# Altium PCB Mixed Signal Board Project.PcbDoc
Units mm, origin at the board's own origin, x right, y up, seen from the top; angles counter-clockwise.
Board outline 70.1 x 70.99 mm, 2 copper layers (Top Layer, Bottom Layer); 188 components, 145 nets, 738 pads, 10 vias.
Unrouted connection lines stored in the file: 494.
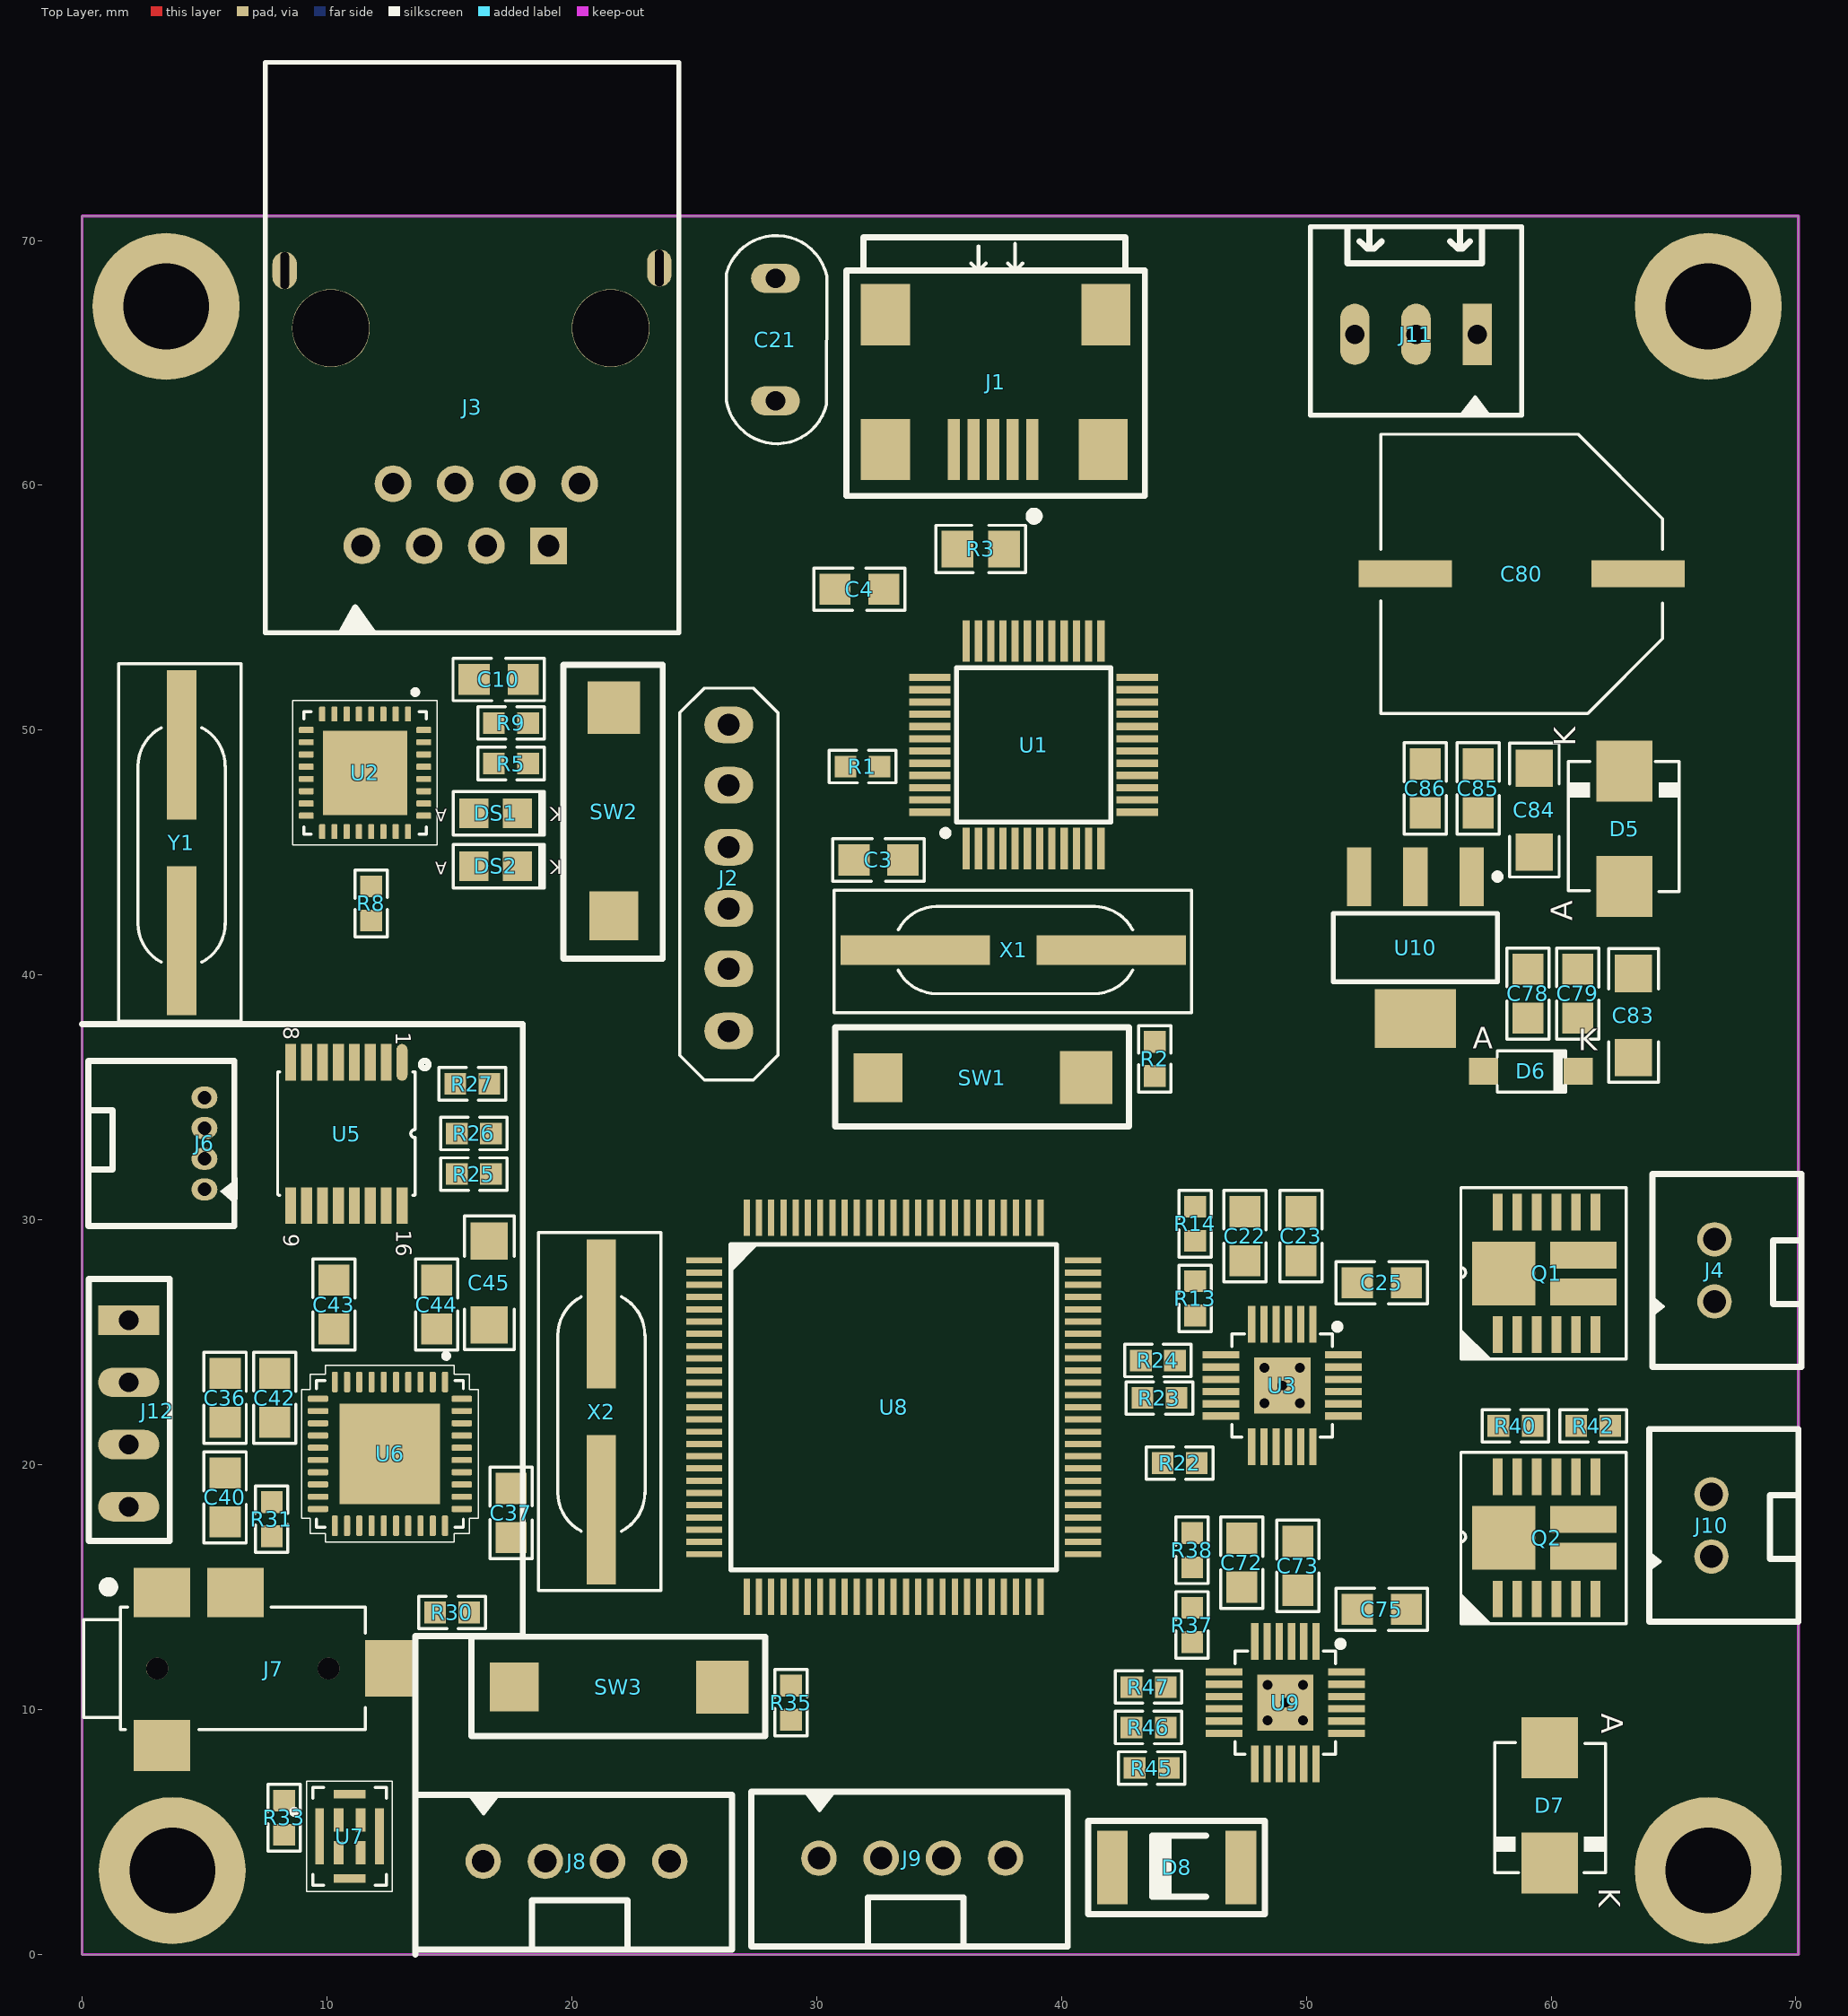
[diagram p0: Top Layer view]
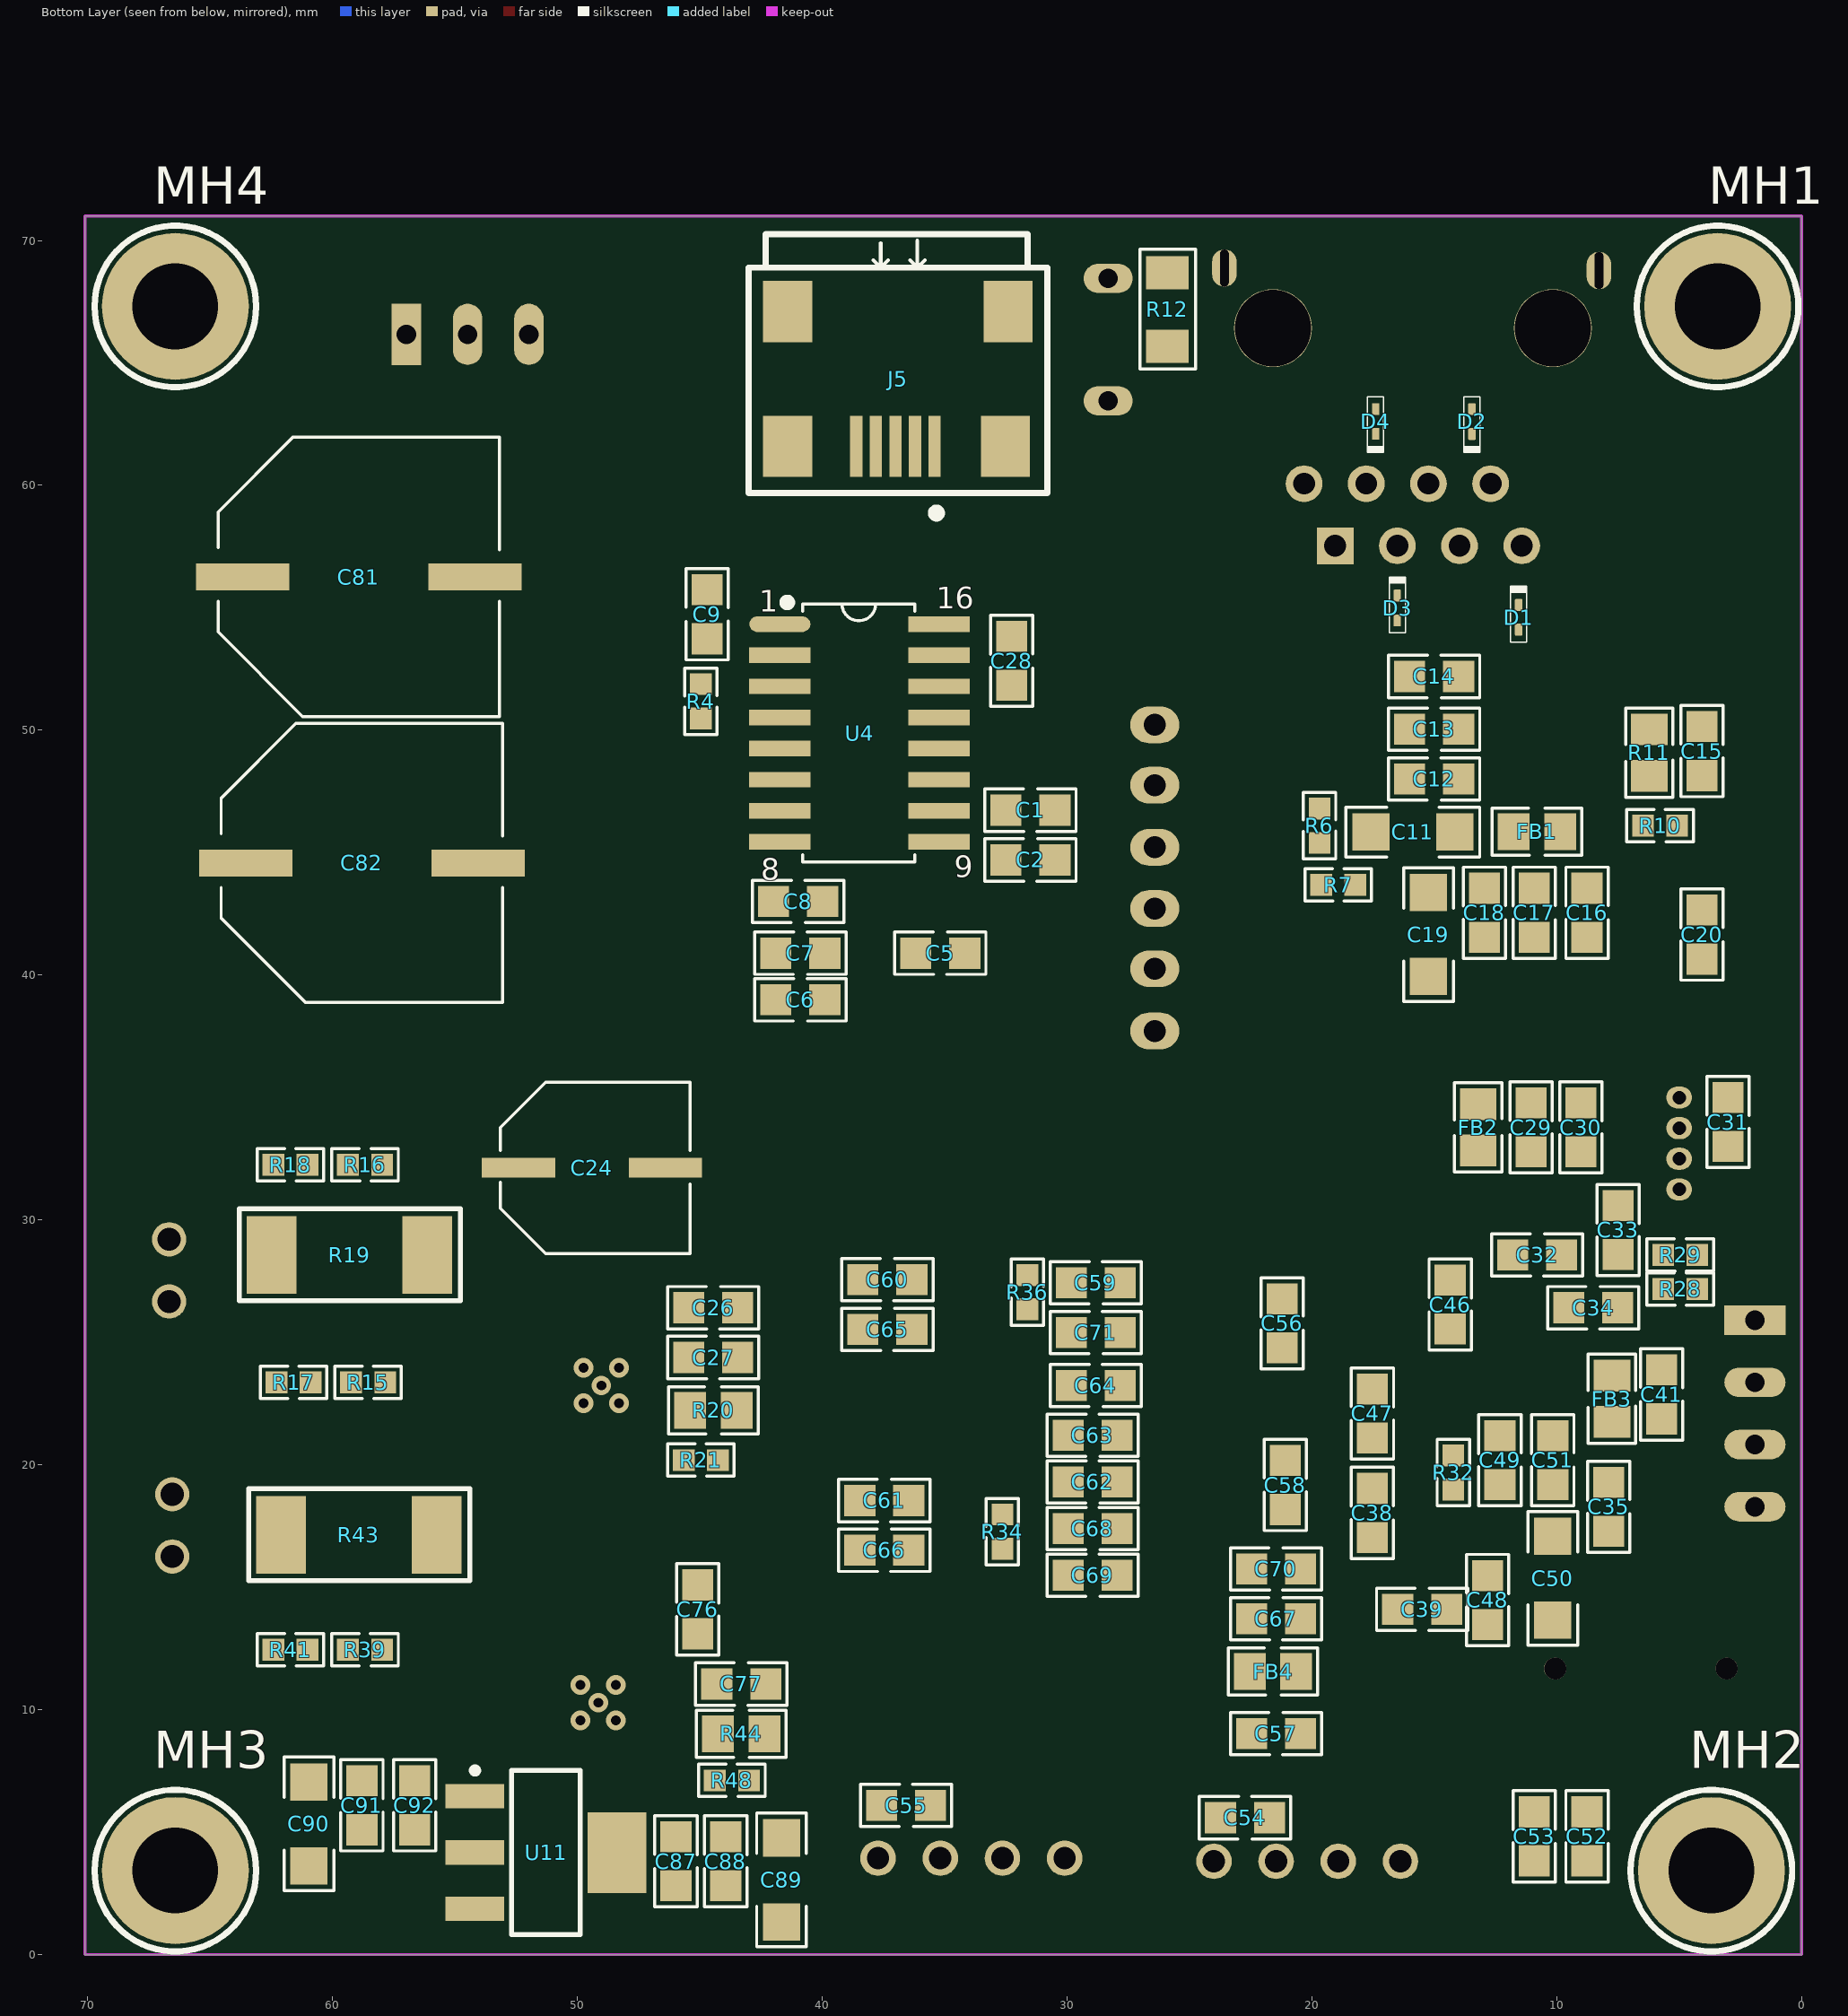
[diagram p1: Bottom Layer view, seen from below]

## Layer stack, top to bottom
Top Solder: solder mask 0.0102, Solder Resist, Dk 3.5
Top Layer: signal copper 0.0356
Dielectric 1: dielectric 0.32, FR-4, Dk 4.8
Bottom Layer: signal copper 0.0356
Bottom Solder: solder mask 0.0102, Solder Resist, Dk 3.5

## Board outline
0,0 0,70.993 70.104,70.993 70.104,0

## Design rules (kind name [scope] priority, off if disabled: settings)
Clearance [All] p1: gap=0.254 ignorepadtopadclearanceinfootprint=TRUE except(0: Arc-Hole Track-Hole SMDPad-Hole THPad-Hole Via-Hole Fill-Hole Poly-Hole Region-Hole Text-Hole)
DiffPairsRouting [All] p1: maxlimit=0.254 minlimit=0.254 mostfreqgap=0.254 toplayer_minwidth=0.381 toplayer_maxwidth=0.381 toplayer_prefwidth=0.381 bottomlayer_minwidth=0.381 bottomlayer_maxwidth=0.381 bottomlayer_prefwidth=0.381 substack1={4C87D943-4441-4401-8E35-BCE7F7EB81D5} toplayer_{4c87d943-4441-4401-8e35-bce7f7eb81d5}_minwidth=0.381 toplayer_{4c87d943-4441-4401-8e35-bce7f7eb81d5}_maxwidth=0.381 toplayer_{4c87d943-4441-4401-8e35-bce7f7eb81d5}_prefwidth=0.381 bottomlayer_{4c87d943-4441-4401-8e35-bce7f7eb81d5}_minwidth=0.381 bottomlayer_{4c87d943-4441-4401-8e35-bce7f7eb81d5}_maxwidth=0.381 bottomlayer_{4c87d943-4441-4401-8e35-bce7f7eb81d5}_prefwidth=0.381 maxuncoupledlength=12.7
PolygonConnect [All] p1: connectstyle=Relief reliefconductorwidth=0.254 reliefentries=4 polygonreliefangle="90 Angle" airgapwidth=0.254
RoutingVias [All] p1: holewidth=0.711 width=1.27 viastyle="Through Hole" minholewidth=0.711 minwidth=1.27 maxholewidth=0.711 maxwidth=1.27
SolderMaskExpansion [All] p1: expansion=0.102 istentingtop=FALSE
Width [All] p1: maxlimit=0.254 minlimit=0.254 preferedwidth=0.254 substack1={4C87D943-4441-4401-8E35-BCE7F7EB81D5}
29 further rules are at their usual default settings.

## Classes and differential pairs
differential pair class DIFF100: RD TD
differential pair class DIFF90: CH340USB_D USBD
net class 50OHM: COL CRS INT MDC MDIO RX_CLK RX_D0 RX_D1 RX_D2 RX_D3 RX_DV RX_ER TX_CLK TX_D0 TX_D1 TX_D2 TX_D3 TX_EN
component class "[11]- Power Input and Regulators": C78 C79 C80 C81 C82 C83 C84 C85 C86 C87 C88 C89 C90 C91 C92 D5 D6 D7 D8 J11 MH1 MH2 MH3 MH4 U10 U11
component class "[10]-Motor Driver-2": C72 C73 C75 C76 C77 J10 Q2 R37 R38 R39 R40 R41 R42 R43 R44 R45 R46 R47 R48 U9
component class "[9]-STM32F407 Controller": C54 C55 C56 C57 C58 C59 C60 C61 C62 C63 C64 C65 C66 C67 C68 C69 C70 C71 FB4 J8 J9 R34 R35 R36 SW3 U8 X2
component class "[8]-DAC and MIC": C35 C36 C37 C38 C39 C40 C41 C42 C43 C44 C45 C46 C47 C48 C49 C50 C51 C52 C53 FB3 J7 J12 R30 R31 R32 R33 U6 U7
component class "[7]- ADC Chip": C29 C30 C31 C32 C33 C34 FB2 J6 R25 R26 R27 R28 R29 U5
component class [6]-CH340C: C28 J5 U4
component class "[5]-Motor Driver Schematic": C22 C23 C24 C25 C26 C27 J4 Q1 R13 R14 R15 R16 R17 R18 R19 R20 R21 R22 R23 R24 U3
component class "[4]- Ethernet PHY": C10 C11 C12 C13 C14 C15 C16 C17 C18 C19 C20 C21 D1 D2 D3 D4 DS1 DS2 FB1 J3 R5 R6 R7 R8 R9 R10 R11 R12 SW2 U2 Y1
component class "[3]-STM32F103 Debugger": C1 C2 C3 C4 C5 C6 C7 C8 C9 J1 J2 R1 R2 R3 R4 SW1 U1 X1
differential pair USBD: +USBD_P -USBD_N
differential pair TD: +TD_P -TD_N
differential pair RD: +RD_P -RD_N
differential pair CH340USB_D: +CH340USB_D_P -CH340USB_D_N

## Components (designator, comment, footprint, x,y, rotation, side; value= is the part's Value field where it differs from the comment)
C1 "4.7uF" CAP_0805 31.496,46.736 r0 bottom
C2 "0.1uF" CAP_0805 31.496,44.704 r0 bottom
C3 "0.1uF" CAP_0805 32.528,44.704 r0 top
C4 "0.1uF" CAP_0805 31.75,55.753 r0 top
C5 "30pF" CAP_0805 35.179,40.894 r0 bottom
C6 "30pF" CAP_0805 40.894,38.989 r180 bottom
C7 "1uF" CAP_0805 40.894,40.894 r180 bottom
C8 "10nF" CAP_0805 40.985,43.006 r180 bottom
C9 "0.1uF" CAP_0805 44.704,54.737 r270 bottom
C10 "2nF" CAP_0805 17.015,52.07 r180 top
C11 "10uF" CAP_1206 15.875,45.847 r180 bottom
C12 "1uF" CAP_0805 15.008,48.006 r180 bottom
C13 "0.1uF" CAP_0805 15.008,50.038 r180 bottom
C14 "10nF" CAP_0805 15.008,52.197 r180 bottom
C15 "20pF" CAP_0805 4.064,49.149 r270 bottom
C16 "10nF" CAP_0805 8.763,42.545 r90 bottom
C17 "0.1uF" CAP_0805 10.922,42.545 r90 bottom
C18 "1uF" CAP_0805 12.954,42.545 r90 bottom
C19 "10uF" CAP_1206 15.24,41.656 r90 bottom
C20 "20pF" CAP_0805 4.064,41.656 r90 bottom
C21 "10nF" CAP_P196_102X287_H332_RAD_TH 28.321,68.453 r270 top
C22 "0.1uF" CAP_0805 47.498,29.337 r270 top
C23 "1uF" CAP_0805 49.784,29.337 r90 top
C24 "100uF" ACAP_P236_D305_H303_RAD 49.403,32.131 r180 bottom
C25 "0.1uF" CAP_0805 53.086,27.432 r180 top
C26 "1uF" CAP_0805 44.45,26.416 r0 bottom
C27 "1uF" CAP_0805 44.45,24.384 r0 bottom
C28 "0.1uF" CAP_0805 32.258,52.832 r90 bottom
C29 "0.1uF" CAP_0805 11.049,33.782 r270 bottom
C30 "0.1uF" CAP_0805 9.017,33.782 r270 bottom
C31 "0.1uF" CAP_0805 3,34 r270 bottom
C32 "0.1uF" CAP_0805 10.795,28.575 r0 bottom
C33 "10nF" CAP_0805 7.493,29.591 r270 bottom
C34 "10nF" CAP_0805 8.509,26.416 r0 bottom
C35 "22nF" CAP_0805 7.874,18.288 r90 bottom
C36 "0.1uF" CAP_0805 5.842,22.733 r270 top
C37 "1uF" CAP_0805 17.526,18.034 r90 top
C38 "0.1uF" CAP_0805 17.526,18.034 r90 bottom
C39 "22nF" CAP_0805 15.494,14.097 r0 bottom
C40 "0.1uF" CAP_0805 5.842,18.669 r90 top
C41 "1uF" CAP_0805 5.715,22.876 r270 bottom
C42 "1uF" CAP_0805 7.874,22.733 r270 top
C43 "1uF" CAP_0805 10.287,26.543 r270 top
C44 "0.1uF" CAP_0805 14.478,26.543 r270 top
C45 "10uF" CAP_1206 16.637,27.432 r270 top
C46 "0.1uF" CAP_0805 14.351,26.543 r270 bottom
C47 "0.1uF" CAP_0805 17.526,22.098 r270 bottom
C48 "150pF" CAP_0805 12.827,14.478 r270 bottom
C49 "150pF" CAP_0805 12.319,20.193 r90 bottom
C50 "10uF" CAP_1206 10.16,15.367 r270 bottom
C51 "1uF" CAP_0805 10.16,20.193 r90 bottom
C52 "1uF" CAP_0805 8.763,4.826 r90 bottom
C53 "0.1uF" CAP_0805 10.922,4.826 r90 bottom
C54 "0.1uF" CAP_0805 22.733,5.588 r180 bottom
C55 "0.1uF" CAP_0805 36.576,6.096 r180 bottom
C56 "30pF" CAP_0805 21.209,25.781 r90 bottom
C57 "0.1uF" CAP_0805 21.463,9.017 r0 bottom
C58 "30pF" CAP_0805 21.082,19.177 r270 bottom
C59 "4.7uF" CAP_0805 28.829,27.432 r180 bottom
C60 "0.1uF" CAP_0805 37.338,27.559 r0 bottom
C61 "0.1uF" CAP_0805 37.465,18.542 r0 bottom
C62 "0.1uF" CAP_0805 28.956,19.304 r180 bottom
C63 "0.1uF" CAP_0805 28.956,21.209 r180 bottom
C64 "0.1uF" CAP_0805 28.829,23.241 r180 bottom
C65 "2.2uF" CAP_0805 37.338,25.527 r0 bottom
C66 "2.2uF" CAP_0805 37.465,16.51 r0 bottom
C67 "1uF" CAP_0805 21.463,13.716 r0 bottom
C68 "1uF" CAP_0805 28.956,17.399 r180 bottom
C69 "0.1uF" CAP_0805 28.956,15.494 r180 bottom
C70 "0.1uF" CAP_0805 21.463,15.748 r0 bottom
C71 "0.1uF" CAP_0805 28.829,25.4 r180 bottom
C72 "0.1uF" CAP_0805 47.371,16.002 r270 top
C73 "1uF" CAP_0805 49.657,15.875 r90 top
C75 "0.1uF" CAP_0805 53.086,14.097 r180 top
C76 "1uF" CAP_0805 45.085,14.097 r270 bottom
C77 "1uF" CAP_0805 43.307,11.049 r0 bottom
C78 "0.1uF" CAP_0805 59.055,39.243 r270 top
C79 "1uF" CAP_0805 61.087,39.243 r270 top
C80 "100uF" ACAP_P305_D393_H393_RAD 58.801,56.388 r180 top
C81 "100uF" ACAP_P305_D393_H393_RAD 58.928,56.261 r180 bottom
C82 "100uF" ACAP_P305_D393_H393_RAD 58.801,44.577 r180 bottom
C83 "10uF" CAP_1206 63.373,38.354 r270 top
C84 "10uF" CAP_1206 59.309,46.736 r90 top
C85 "1uF" CAP_0805 57.023,47.625 r90 top
C86 "0.1uF" CAP_0805 54.864,47.625 r90 top
C87 "0.1uF" CAP_0805 45.974,3.81 r270 bottom
C88 "1uF" CAP_0805 43.942,3.81 r270 bottom
C89 "10uF" CAP_1206 41.656,3.048 r270 bottom
C90 "10uF" CAP_1206 60.96,5.334 r270 bottom
C91 "1uF" CAP_0805 58.801,6.096 r270 bottom
C92 "0.1uF" CAP_0805 56.642,6.096 r270 bottom
D1 "ESD3V3D9-TP" DIO_SOD-923 11.557,54.61 r270 bottom
D2 "ESD3V3D9-TP" DIO_SOD-923 13.462,62.608 r90 bottom
D3 "ESD3V3D9-TP" DIO_SOD-923 16.51,54.991 r270 bottom
D4 "ESD3V3D9-TP" DIO_SOD-923 17.399,62.611 r90 bottom
D5 "MBRS130LT3G" DIO_SMB_DO-214AA 62.992,45.974 r90 top
D6 "BZT52C3V3-7-F" DIO_SOD-123 59.182,36.068 r0 top
D7 "MBRS130LT3G" DIO_SMB_DO-214AA 59.944,6.096 r270 top
D8 "1.8V Zener" DIO_DO-213AB_SMD 44.704,3.556 r0 top
DS1 "RED LED" LED_0805 16.891,46.609 r180 top
DS2 "RED LED" LED_0805 16.891,44.45 r180 top
FB1 "1K" IND_0805 10.807,45.86 r180 bottom
FB2 "1K" IND_0805 13.208,33.782 r270 bottom
FB3 "1K" IND_0805 7.747,22.698 r90 bottom
FB4 "1K" IND_0805 21.59,11.557 r180 bottom
J1 "USB2.0 MINI B" CON_690-005-299-043 32.811,61.468 r270 top
J2 "Bergstrip 2.54mm" CON6_100_59D78_TH_ST 26.416,37.719 r90 top
J3 "RJ45 LAN" CON10_P106_RJ45_TH_ST 21.575,66.476 r180 top
J4 "B2B-XH-A(LF)(SN)" CON2_100_B2B-XH-A_TH_ST 66.675,26.67 r90 top
J5 "USB2.0 MINI B" CON_690-005-299-043 41.412,61.595 r270 bottom
J6 "1.25MM Spade 4PIN" CON4_50_653004117322_TH_RA 5,35 r90 top
J7 "4X1 STEREO" CON_SJ-2504A-SMT-TR_SMD 6.563,11.684 r0 top
J8 "B4B-XH-A(LF)(SN)" CON4_100_B4B-XH-A_TH_ST 16.383,3.81 r0 top
J9 "B4B-XH-A(LF)(SN)" CON4_100_B4B-XH-A_TH_ST 30.099,3.937 r0 top
J10 "B2B-XH-A(LF)(SN)" CON2_100_B2B-XH-A_TH_ST 66.548,16.256 r90 top
J11 "Terminal Block 2.5mm" CON3_100_TB_TH_ST 54.483,66.167 r270 top
J12 "4X1 BERG STRIP" CON4_100_40D72_TH_ST_MALE 1.905,25.908 r0 top
MH1 "Mounting Hole" MOUNTING 3.429,67.31 r180 bottom
MH2 "Mounting Hole" MOUNTING 3.683,3.429 r180 bottom
MH3 "Mounting Hole" MOUNTING 66.421,3.429 r180 bottom
MH4 "Mounting Hole" MOUNTING 66.421,67.31 r180 bottom
Q1 "DMHT6016LFJ-13" DFN5045-12_33_212_27X15_SMD_1 59.817,27.813 r0 top
Q2 "DMHT6016LFJ-13" DFN5045-12_33_212_27X15_SMD_1 59.817,17.018 r0 top
R1 "100K" RES_0603 31.877,48.514 r0 top
R2 "10K" RES_0603 43.815,36.576 r90 top
R3 "1.5K" RES_0805 36.703,57.404 r0 top
R4 "100K" RES_0603 44.958,51.181 r270 bottom
R5 "10K" RES_0603 17.519,48.641 r0 top
R6 "3K3" RES_0603 19.685,46.101 r90 bottom
R7 "3K3" RES_0603 18.923,43.688 r180 bottom
R8 "10K" RES_0603 11.811,42.926 r270 top
R9 "10K" RES_0603 17.519,50.292 r0 top
R10 "10K" RES_0603 5.778,46.101 r0 bottom
R11 "6.49K" RES_0805 6.223,49.083 r90 bottom
R12 "1M" RES_1206 25.908,67.183 r90 bottom
R13 "2K" RES_0603 45.466,26.797 r270 top
R14 "3K3" RES_0603 45.466,29.845 r270 top
R15 "10K" RES_0603 58.547,23.368 r0 bottom
R16 "10K" RES_0603 58.674,32.258 r180 bottom
R17 "10K" RES_0603 61.595,23.368 r0 bottom
R18 "10K" RES_0603 61.722,32.258 r0 bottom
R19 "50mOHM" RES_2512 59.309,28.575 r0 bottom
R20 "33K" RES_0805 44.45,22.225 r180 bottom
R21 "10K" RES_0603 44.958,20.193 r0 bottom
R22 "10K" RES_0603 44.831,20.066 r0 top
R23 "10K" RES_0603 44.006,22.733 r180 top
R24 "10K" RES_0603 43.942,24.257 r180 top
R25 "10K" RES_0603 16.002,31.877 r0 top
R26 "10K" RES_0603 16.002,33.528 r0 top
R27 "100K" RES_0603 15.938,35.56 r0 top
R28 "1K" RES_0603 4.953,27.178 r180 bottom
R29 "1K" RES_0603 4.953,28.575 r180 bottom
R30 "51.1R" RES_0603 15.113,13.97 r0 top
R31 "51.1R" RES_0603 7.747,17.78 r90 top
R32 "10K" RES_0603 14.224,19.685 r90 bottom
R33 "10K" RES_0603 8.255,5.588 r90 top
R34 "100K" RES_0603 32.639,17.272 r270 bottom
R35 "10K" RES_0603 28.956,10.287 r270 top
R36 "100K" RES_0603 31.623,27.051 r270 bottom
R37 "2K" RES_0603 45.339,13.462 r270 top
R38 "3K3" RES_0603 45.339,16.51 r270 top
R39 "10K" RES_0603 58.674,12.446 r0 bottom
R40 "10K" RES_0603 58.547,21.59 r180 top
R41 "10K" RES_0603 61.722,12.446 r0 bottom
R42 "10K" RES_0603 61.722,21.59 r0 top
R43 "50mOHM" RES_2512 58.928,17.145 r0 bottom
R44 "33K" RES_0805 43.307,9.017 r180 bottom
R45 "10K" RES_0603 43.688,7.62 r0 top
R46 "10K" RES_0603 43.561,9.271 r180 top
R47 "10K" RES_0603 43.561,10.922 r180 top
R48 "10K" RES_0603 43.688,7.112 r0 bottom
SW1 "TACTILE SWITCH" SW_342_SMD 32.512,35.814 r180 top
SW2 "TACTILE SWITCH" SW_342_SMD 21.717,42.418 r270 top
SW3 "TACTILE SWITCH" SW_342_SMD 17.653,10.922 r180 top
U1 "STM32F103C8T6" LQFP-48_19.6_393_58X11_SMD 38.862,49.403 r90 top
U2 "DP83826IRHBR" VQFN32_19_218_23X9_SMD 11.557,48.26 r270 top
U3 "DRV8701ERGET" VFQFN24_19.6_196_12X32_SMD_1 47.022,24.491 r270 top
U4 "CH340C" SOIC16_50_284_25X90_SMT 38.481,49.911 r180 bottom
U5 "ADS122C04IPW" TSSOP16_25-59_294_54X14_SMT 10.795,33.528 r270 top
U6 "CS43L22-CNZ" QFN40_19_284_33X9_SMD 12.573,20.447 r270 top
U7 "IMP34DT05TR" HCLGA-4_53_137_15X37_SMD 10.922,4.826 r0 top
U8 "STM32F407VGT6" QFN100_19.6_669_58X10_SMD 33.147,22.225 r0 top
U9 "DRV8701ERGET" VFQFN24_19.6_196_12X32_SMD_1 47.149,11.537 r270 top
U10 "LD1117S33CTR" SOT223_3 54.483,41.148 r270 top
U11 "LD1117S18TR" SOT223_3 51.308,4.191 r180 bottom
X1 "8Mhz" XTAL_314_240X47_SMD 42.037,41.021 r180 top
X2 "8Mhz" XTAL_314_240X47_SMD 21.209,18.161 r90 top
Y1 "25Mhz -14mm" XTAL_314_240X47_SMD 4.064,41.403 r90 top

## Footprints (in the part's own frame and the unit in brackets; to place one, negate y for a bottom-side part, rotate by r counter-clockwise, add the part's x,y. Pads: shape width x height; smd on the part's side, far side on the other; paste and mask are expansions set on the pad)
ACAP_P236_D305_H303_RAD [mm] "Aluminium Capacitor"
  rect 3x0.8 smd mask+0.076: 1(-3,0) 2(3,0)
  silkscreen extent -3.75,-3.5 4,3.5, body extent -3.5,-3.3 3.5,3.3, height 8.11
ACAP_P305_D393_H393_RAD [mm] "Aluminium Capacitor"
  rect 3.81x1.1 smd: 1(-4.75,0) 2(4.75,0)
  silkscreen extent -5.75,-5.7 5.75,5.7, body extent -5.5,-5.2 5.5,5.2, height 10.41
CAP_0805 [mm] "Ceramic Capacitor"
  rect 1.27x1.27 smd mask+0.076: 1(-1,0) 2(1,0)
  silkscreen extent -1.86,-0.86 1.86,0.86, body extent -1,-0.62 1,0.63, height 0.78
CAP_1206 [mil] "Ceramic Capacitor"
  rect 60x60 smd: 1(-67.49,-0.2) 2(67.51,-0.2)
  silkscreen extent -107,-40 108,40, body extent -63,-31 63,32, height 39
CAP_P196_102X287_H332_RAD_TH [mm] "Y1 CAP, TROUGH HOLE"
  oval 1.2x2 hole 0.8 mask+0.076: 1(0,0) 2(5,0)
  silkscreen extent -1.75,-2 6.75,2.1, body extent -1.04,-1.3 6.04,1.3, height 9.14
CON2_100_B2B-XH-A_TH_ST [mm] "Connector Header"
  round 1.4 hole 0.94: 1(0,0) 2(2.54,0)
  silkscreen extent -2.67,-3.56 5.21,2.54, body extent -2.41,-3.5 5.01,2.54, height 8.44
CON3_100_TB_TH_ST [mm]
  rect 2.5x1.2 hole 0.8: 1(0,2.5)
  oval 2.5x1.2 hole 0.8: 2(0,0) 3(0,-2.5)
  silkscreen extent -4.4,-4.32 3.3,4.32, body extent -2.5,-4.07 3.1,4.07, height 12.86
CON4_50_653004117322_TH_RA [mm] "wurth connector"
  oval 0.9x1.05 hole 0.55: 1(-3.75,0) 2(-2.5,0) 3(-1.25,0) 4(0,0)
  silkscreen extent -5.25,-1.34 1.5,4.75, body extent -5.27,-0.45 1.48,4.98, height 3.65
CON4_100_40D72_TH_ST_MALE [mm] "Berg Strip"
  rect 2.5x1.2 hole 0.8: 1(0,0)
  oval 2.5x1.2 hole 0.8: 2(0,-2.54) 3(0,-5.08) 4(0,-7.62)
  round 1.016 on Top Overlay: ""(2.311,0.178)
  silkscreen extent -1.63,-9.02 1.68,1.68, body extent -1.14,-8.76 1.4,1.4, height 8.55
CON4_100_B4B-XH-A_TH_ST [mm] "Connector Header"
  round 1.45 hole 0.91: 1(0,0) 2(2.54,0) 3(5.08,0) 4(7.62,0)
  silkscreen extent -2.77,-3.61 10.16,2.72, body extent -2.4,-3.28 10,2.48, height 8.32
CON6_100_59D78_TH_ST [mm] "Bergstrip"
  oval 1.5x2 hole 0.9: 1(0,0) 2(2.54,0) 3(5,0) 4(7.5,0) 5(10.04,0) 6(12.5,0)
  silkscreen extent -2,-2 14,2, body extent -1.35,-1.24 13.89,1.3, height 8.55
CON10_P106_RJ45_TH_ST [mm] "LAN Connector"
  round 1.5 hole 0.89 paste-1000 mask+0: 1(10.145,8.945) 2(8.875,6.405) 3(7.605,8.945) 4(6.335,6.405) 5(5.065,8.945) 6(3.795,6.405) 8(1.255,6.405)
  rect 1.5x1.5 hole 0.89 paste-1000 mask+0: 7(2.525,8.945)
  oval 1x1.524 hole 1.5 slot 0.35 at 0 deg: 9(13.3,-2.3) 10(-2,-2.4)
  round 3.18 hole 3.12 unplated paste-1000 mask+0: ""(-0.015,0.055) ""(11.415,0.055)
  silkscreen extent -2.79,-10.8 14.1,12.5, body extent -2.53,-3.5 13.73,12.25, height 13.04
CON_690-005-299-043 [mm] "USB MINI-B"
  rect 2.5x0.5 smd: 1(0,6) 2(0,5.2) 3(0,4.4) 4(0,3.6) 5(0,2.8)
  rect 2.5x2 smd: 6(-5.5,9) 6(-5.5,0) 6(0,8.9) 6(0,0)
  silkscreen extent -8.66,-1.6 2.88,10.6, body extent -8.4,-0.55 0.6,9.35, height 3.96
CON_SJ-2504A-SMT-TR_SMD [mm]
  rect 2.3x2 smd: 1(-3.3,3.1) 3(-0.3,3.1)
  rect 2x2.3 smd: 2(6,0)
  rect 2.3x2.1 smd: 4(-3.3,-3.15)
  round 0.9 hole 0.9 unplated: ""(-3.5,0) ""(3.5,0)
  silkscreen extent -6.5,-2.5 5,3.53, body extent -6.5,-4 6.5,4, height 4.01
DFN5045-12_33_212_27X15_SMD_1 [mm] "CASE: DFN5045"
  rect 0.4x1.5 smd: 1(-2,-2.5) 2(-1.2,-2.5) 3(-0.4,-2.5) 4(0.4,-2.5) 5(1.2,-2.5) 6(2,-2.5) 7(2,2.5) 8(1.2,2.5) 9(0.4,2.5) 10(-0.4,2.5) 11(-1.2,2.5) 12(-2,2.5)
  rect 2.7x1.1 smd: 13(1.5,-0.75) 14(1.5,0.75)
  rect 2.6x2.6 smd: 15(-1.75,0)
  silkscreen extent -3.5,-3.5 3.25,3.5, body extent -2.5,-2.36 2.5,2.36, height 0.9
DIO_DO-213AB_SMD [mm] "Diode"
  rect 1.25x3 smd: A(2.625,0) K(-2.625,0)
  silkscreen extent -3.61,-1.9 3.6,1.9, body extent -2.49,-1.25 2.51,1.25, height 2.75
DIO_SMB_DO-214AA [mm] "Diode"
  rect 2.5x2.3 smd: A(-2.35,0) K(2.354,0)
  silkscreen extent -2.56,-2.25 2.75,2.29, body extent -2.56,-1.84 2.84,1.76, height 2.27
DIO_SOD-123 [mm] "DIODE GEN PURP"
  rect 1.2x1.1 smd mask+0.076: A(-1.937,0.006) K(1.923,0.006)
  silkscreen extent -1.38,-0.84 1.44,0.86, body extent -1.92,-0.84 1.92,0.86, height 1.43
DIO_SOD-923 [mm]
  rrect25% 0.49x0.3 smd: A(0.505,0) K(-0.505,0)
  silkscreen extent -1.27,-0.33 1.02,0.33
HCLGA-4_53_137_15X37_SMD [mm]
  rect 0.4x0.95 smd: 1(-0.45,0.675) 2(-0.45,-0.675) 3(0.45,-0.675) 4(0.45,0.675)
  rect 0.35x2.3 smd: 5(-1.225,0) 5(1.225,0)
  rect 1.3x0.35 smd: 5(0,-1.725) 5(0,1.725)
  silkscreen extent -2.35,-2.25 1.75,2.25, body extent -1.5,-2 1.5,2, height 1.02
IND_0805 [mm] "Ferrite Bead"
  rect 1.3x1.5 smd mask+0.076: 1(0.95,0) 2(-0.95,0)
  silkscreen extent -1.83,-0.97 1.83,0.97, body extent -1,-0.63 1,0.62, height 0.5
LED_0805 [mm] "LED"
  rect 1.2x1.2 smd mask+0.076: A(0.889,0) K(-0.889,0)
  silkscreen extent -1.99,-0.89 1.73,0.89, body extent -1.01,-0.62 1.01,0.63, height 1.1
LQFP-48_19.6_393_58X11_SMD [mm] "48LQFP"
  rect 1.7x0.3 smd mask+0.076: 1(-4.238,2.75) 2(-4.238,2.25) 3(-4.238,1.75) 4(-4.238,1.25) 5(-4.238,0.75) 6(-4.238,0.25) 7(-4.238,-0.25) 8(-4.238,-0.75) 9(-4.238,-1.25) 10(-4.238,-1.75) 11(-4.238,-2.25) 12(-4.238,-2.75) 25(4.238,-2.75) 26(4.238,-2.25) 27(4.238,-1.75) 28(4.238,-1.25) 29(4.238,-0.75) 30(4.238,-0.25) 31(4.238,0.25) 32(4.238,0.75) 33(4.238,1.25) 34(4.238,1.75) 35(4.238,2.25) 36(4.238,2.75)
  rect 0.3x1.7 smd mask+0.076: 13(-2.75,-4.238) 14(-2.25,-4.238) 15(-1.75,-4.238) 16(-1.25,-4.238) 17(-0.75,-4.238) 18(-0.25,-4.238) 19(0.25,-4.238) 20(0.75,-4.238) 21(1.25,-4.238) 22(1.75,-4.238) 23(2.25,-4.238) 24(2.75,-4.238) 37(2.75,4.238) 38(2.25,4.238) 39(1.75,4.238) 40(1.25,4.238) 41(0.75,4.238) 42(0.25,4.238) 43(-0.25,4.238) 44(-0.75,4.238) 45(-1.25,4.238) 46(-1.75,4.238) 47(-2.25,4.238) 48(-2.75,4.238)
  silkscreen extent -3.72,-3.15 3.15,3.72, body extent -4.5,-4.5 4.5,4.5, height 1.7
MOUNTING [mm] "MH"
  round 6 hole 3.5: 1(0,0)
  silkscreen extent -3.3,-3.3 3.3,3.3, body extent -3,-2.75 3,2.75, height 4.24
QFN40_19_284_33X9_SMD [mm]
  rrect48% 0.84x0.25 smd: 1(-2.935,2.25) 2(-2.935,1.75) 3(-2.935,1.25) 4(-2.935,0.75) 5(-2.935,0.25) 6(-2.935,-0.25) 7(-2.935,-0.75) 8(-2.935,-1.25) 9(-2.935,-1.75) 10(-2.935,-2.25) 21(2.935,-2.25) 22(2.935,-1.75) 23(2.935,-1.25) 24(2.935,-0.75) 25(2.935,-0.25) 26(2.935,0.25) 27(2.935,0.75) 28(2.935,1.25) 29(2.935,1.75) 30(2.935,2.25)
  rrect48% 0.25x0.84 smd: 11(-2.25,-2.935) 12(-1.75,-2.935) 13(-1.25,-2.935) 14(-0.75,-2.935) 15(-0.25,-2.935) 16(0.25,-2.935) 17(0.75,-2.935) 18(1.25,-2.935) 19(1.75,-2.935) 20(2.25,-2.935) 31(2.25,2.935) 32(1.75,2.935) 33(1.25,2.935) 34(0.75,2.935) 35(0.25,2.935) 36(-0.25,2.935) 37(-0.75,2.935) 38(-1.25,2.935) 39(-1.75,2.935) 40(-2.25,2.935)
  rect 4.1x4.1 smd paste-3: 41(0,0)
  silkscreen extent -4.1,-3.61 3.61,3.61, body extent -3.07,-3 3.07,3.15, height 1.06
QFN100_19.6_669_58X10_SMD [mm] "CASE: QFN"
  rect 1.475x0.254 smd mask+0.076: 1(-7.738,6.127) 2(-7.738,5.627) 3(-7.738,5.127) 4(-7.738,4.627) 5(-7.738,4.127) 6(-7.738,3.627) 7(-7.738,3.127) 8(-7.738,2.627) 9(-7.738,2.127) 10(-7.738,1.627) 11(-7.738,1.127) 12(-7.738,0.627) 13(-7.738,0.127) 14(-7.738,-0.373) 15(-7.738,-0.873) 16(-7.738,-1.373) 17(-7.738,-1.873) 18(-7.738,-2.373) 19(-7.738,-2.873) 20(-7.738,-3.373) 21(-7.738,-3.873) 22(-7.738,-4.373) 23(-7.738,-4.873) 24(-7.738,-5.373) 25(-7.738,-5.873) 51(7.738,-5.873) 52(7.738,-5.373) 53(7.738,-4.873) 54(7.738,-4.373) 55(7.738,-3.873) 56(7.738,-3.373) 57(7.738,-2.873) 58(7.738,-2.373) 59(7.738,-1.873) 60(7.738,-1.373) 61(7.738,-0.873) 62(7.738,-0.373) 63(7.738,0.127) 64(7.738,0.627) 65(7.738,1.127) 66(7.738,1.627) 67(7.738,2.127) 68(7.738,2.627) 69(7.738,3.127) 70(7.738,3.627) 71(7.738,4.127) 72(7.738,4.627) 73(7.738,5.127) 74(7.738,5.627) 75(7.738,6.127)
  rect 0.254x1.475 smd mask+0.076: 26(-6,-7.611) 27(-5.5,-7.611) 28(-5,-7.611) 29(-4.5,-7.611) 30(-4,-7.611) 31(-3.5,-7.611) 32(-3,-7.611) 33(-2.5,-7.611) 34(-2,-7.611) 35(-1.5,-7.611) 36(-1,-7.611) 37(-0.5,-7.611) 38(0,-7.611) 39(0.5,-7.611) 40(1,-7.611) 41(1.5,-7.611) 42(2,-7.611) 43(2.5,-7.611) 44(3,-7.611) 45(3.5,-7.611) 46(4,-7.611) 47(4.5,-7.611) 48(5,-7.611) 49(5.5,-7.611) 50(6,-7.611) 76(6,7.865) 77(5.5,7.865) 78(5,7.865) 79(4.5,7.865) 80(4,7.865) 81(3.5,7.865) 82(3,7.865) 83(2.5,7.865) 84(2,7.865) 85(1.5,7.865) 86(1,7.865) 87(0.5,7.865) 88(0,7.865) 89(-0.5,7.865) 90(-1,7.865) 91(-1.5,7.865) 92(-2,7.865) 93(-2.5,7.865) 94(-3,7.865) 95(-3.5,7.865) 96(-4,7.865) 97(-4.5,7.865) 98(-5,7.865) 99(-5.5,7.865) 100(-6,7.865)
  silkscreen extent -6.65,-6.52 6.65,6.78, body extent -8,-8 8,8.13, height 1.6
RES_0603 [mil] "CASE: 0603"
  rect 35x35 smd mask+3: 1(-27.5,0) 2(27.5,0)
  silkscreen extent -53,-26 54,26, body extent -31,-16 31,16, height 18
RES_0805 [mm] "Resister"
  rect 1.3x1.5 smd mask+0.076: 1(0.95,0) 2(-0.95,0)
  silkscreen extent -1.83,-0.97 1.83,0.97, body extent -1,-0.63 1,0.62, height 0.5
RES_1206 [mm] "CASE: 1206"
  rect 1.35x1.75 smd: 1(1.5,0) 2(-1.5,0)
  silkscreen extent -2.44,-1.15 2.46,1.11, body extent -1.55,-0.77 1.55,0.78, height 0.55
RES_2512 [mil] "CASE: 2512"
  rect 80x125 smd: 1(-125,0) 2(125,0)
  silkscreen extent -178,-74 177,74, body extent -139,-60 136,61, height 19
SOIC16_50_284_25X90_SMT [mm]
  oval 2.5x0.635 smd mask+0.076: 1(-3.25,4.42)
  rect 2.5x0.635 smd mask+0.076: 2(-3.25,3.15) 3(-3.25,1.88) 4(-3.25,0.61) 5(-3.25,-0.66) 6(-3.25,-1.93) 7(-3.25,-3.2) 8(-3.25,-4.47) 9(3.25,-4.47) 10(3.25,-3.2) 11(3.25,-1.93) 12(3.25,-0.66) 13(3.25,0.61) 14(3.25,1.88) 15(3.25,3.15) 16(3.25,4.42)
  silkscreen extent -3.07,-5.3 2.26,5.44, body extent -3.02,-4.97 2.98,4.93, height 1.4
SOT223_3 [mm] "CASE: SOT223"
  rect 2.4x1 smd: 1(-2.875,2.275) 2(-2.875,-0.025) 3(-2.875,-2.325)
  rect 2.4x3.3 smd: 4(2.925,-0.025)
  silkscreen extent -3,-3.38 1.43,3.45, body extent -3.73,-3.28 3.27,3.22, height 1.7
SW_342_SMD [mm] "CASE: SMD"
  rect 2x2 smd: 1(0,0)
  rect 2.15x2.15 smd: 2(-8.5,0)
  silkscreen extent -10.25,-2.06 1.75,2, body extent -7.17,-1.79 -1.17,1.71, height 2.4
TSSOP16_25-59_294_54X14_SMT [mm] "TSOP, 16-Leads, Body 5.00x4.40mm, Pitch 0.65mm"
  oval 1.5x0.45 smd mask+0.076: 1(-2.908,2.273)
  rect 1.5x0.45 smd mask+0.076: 2(-2.908,1.623) 3(-2.908,0.973) 4(-2.908,0.323) 5(-2.908,-0.327) 6(-2.908,-0.977) 7(-2.908,-1.627) 8(-2.908,-2.277) 9(2.942,-2.277) 10(2.942,-1.627) 11(2.942,-0.977) 12(2.942,-0.327) 13(2.942,0.323) 14(2.942,0.973) 15(2.942,1.623) 16(2.942,2.273)
  silkscreen extent -2.97,-2.81 2.51,3.35, body extent -3.2,-2.55 3.2,2.55, height 1.2
VFQFN24_19.6_196_12X32_SMD_1 [mm] "CASE: VQFN24"
  rect 1.5x0.3 smd mask+0.076: 1(-1.25,3.25) 2(-1.25,2.75) 3(-1.25,2.25) 4(-1.25,1.75) 5(-1.25,1.25) 6(-1.25,0.75) 13(3.75,0.75) 14(3.754,1.25) 15(3.754,1.75) 16(3.754,2.25) 17(3.754,2.75) 18(3.754,3.25)
  rect 0.3x1.5 smd mask+0.076: 7(0,-0.5) 8(0.5,-0.5) 9(1,-0.5) 10(1.5,-0.5) 11(2,-0.5) 12(2.5,-0.5) 19(2.5,4.5) 20(2,4.5) 21(1.5,4.5) 22(1,4.5) 23(0.5,4.5) 24(0,4.5)
  rect 2.3x2.3 smd mask+0.076: 25(1.25,2)
  silkscreen extent -1.27,-0.05 3.35,4.37, body extent -0.8,-0.05 3.3,4.05, height 1
VQFN32_19_218_23X9_SMD [mm]
  rrect25% 0.6x0.25 smd mask+0: 1(-2.4,1.75) 2(-2.4,1.25) 3(-2.4,0.75) 4(-2.4,0.25) 5(-2.4,-0.25) 6(-2.4,-0.75) 7(-2.4,-1.25) 8(-2.4,-1.75) 17(2.4,-1.75) 18(2.4,-1.25) 19(2.4,-0.75) 20(2.4,-0.25) 21(2.4,0.25) 22(2.4,0.75) 23(2.4,1.25) 24(2.4,1.75)
  rrect25% 0.25x0.6 smd mask+0: 9(-1.75,-2.4) 10(-1.25,-2.4) 11(-0.75,-2.4) 12(-0.25,-2.4) 13(0.25,-2.4) 14(0.75,-2.4) 15(1.25,-2.4) 16(1.75,-2.4) 25(1.75,2.4) 26(1.25,2.4) 27(0.75,2.4) 28(0.25,2.4) 29(-0.25,2.4) 30(-0.75,2.4) 31(-1.25,2.4) 32(-1.75,2.4)
  rect 3.45x3.45 smd paste-3 mask+0: 33(0,0)
  silkscreen extent -3.39,-2.95 2.95,2.95, body extent -2.56,-2.56 2.56,2.56, height 1.01
XTAL_314_240X47_SMD [mm] "CASE: TH"
  rect 6.096x1.2 smd: 1(0,0) 2(8,0)
  silkscreen extent -3.29,-2.44 11.32,2.57, body extent -2.99,-2.27 10.9,2.41, height 3.05

## Part data
C1 C59: library part CAP_4.7uF-50V-10%-0805, "4.7µF ±10% 50V Ceramic Capacitor X5R 0805 (2012 Metric)", Alternate Part Number-1=NA, Case/Package=0805, Manufacturer=Yageo, Manufacturer Part Number=GRM21BR61H475KE51L, Supplier Part Number-1=CL21A475KBQNNNE, Supplier-1=SIRICOM
C2 C3 C4 C9 C13 C17 C22 C25 C28 C29 C30 C31 C32 C36 C38 C40 C44 C46 C47 C53 C54 C55 C57 C60 C61 C62 C63 C64 C69 C70 C71 C72 C75 C78 C86 C87 C92: library part CAP_0.1uF-50V-10%-0805, "0.1µF ±10% 50V Ceramic Capacitor X7R 0805 (2012 Metric)", Alternate Part Number-1=NA, Case/Package=0805, Manufacturer=Samsung, Manufacturer Part Number=CL21B104KBCNNNC, Supplier Part Number-1=0805B104K500CT, Supplier-1=SIRICOM
C5 C6 C56 C58: library part CAP_30pF-50V-10%-0805, "±10% 50V Ceramic Capacitor C0G, NP0 0805 (2012 Metric)", Alternate Part Number=NA, Case/Package=0805, Manufacturer=KEMET, Manufacturer Part Number=C0805C300K5GAC7800, Supplier Part Number-1="399-17443-1-ND - Cut Tape (CT)", Supplier-1=Digikey
C7 C12 C18 C23 C26 C27 C37 C41 C42 C43 C51 C52 C67 C68 C73 C76 C77 C79 C85 C88 C91: library part CAP_1uF-50V-5%-0805, "1µF ±5% 50V Ceramic Capacitor X7R 0805 (2012 Metric)", Alternate Part Number-1=0805F105M500NT, Case/Package=0805, Manufacturer=Samsung, Manufacturer Part Number=CC0805JKX7R9BB105, Supplier Part Number-1=CL21B105KBFNNNE, Supplier-1=SIRICOM
C8 C14 C16 C33 C34: library part CAP_10nF-50V-10%-0805, "10000pF ±10% 50V Ceramic Capacitor X7R 0805 (2012 Metric)", Alternate Part Number-1=GRM2195C1H103JA01D, Case/Package=0805, Manufacturer=Samsung, Manufacturer Part Number=C0805C103K5RECAUTO, Supplier Part Number-1=0805B103K500CT, Supplier-1=SIRICOM
C10: library part CAP_2nF-50V-10%-0805, "2000pF ±10% 50V Ceramic Capacitor X7R 0805 (2012 Metric)", Alternate Part Number-1=NA, Case/Package=0805, Manufacturer="Samsung Electro-Mechanics", Manufacturer Part Number=CL21B202KBANNNC, Supplier Part Number-1="1276-2471-1-ND - Cut Tape (CT)", Supplier-1=Digikey
C11 C19 C45 C50 C83 C84 C89 C90: library part CAP_10uF-50V-10%-1206, "10µF ±10% 50V Ceramic Capacitor X7R 1206 (3216 Metric)", Alternate Part Number-1=GRT31CR61H106ME01L, Case/Package=1206, Manufacturer=KEMET, Manufacturer Part Number=CL31B106KBHNNNE, Supplier Part Number-1=CC1206KKX5R9BB106, Supplier-1=SIRICOM
C15 C20: library part CAP_20pF-50V-10%-0805, "±10% 50V Ceramic Capacitor C0G, NP0 0805 (2012 Metric)", Alternate Part Number-1=NA, Case/Package=0805, Manufacturer="AVX Corporation", Manufacturer Part Number=08055A200KAT2A, Supplier Part Number-1="478-11887-1-ND - Cut Tape (CT)", Supplier-1=Digikey
C21: library part CAP_10nF-1KV-10%-RAD-TH, "10000pF ±10% 1000V (1kV) Ceramic Capacitor X7R Radial", Alternate Part Number-1=NA, Case/Package=TH, Manufacturer=Yageo, Manufacturer Part Number=RDER73A103K2K1H03B, Supplier Part Number-1=RDER73A103K2K1H03B, Supplier-1="SP ROAD"
C24: library part CAP-P_100uF-25V-20%-RAD, "100µF 25V Aluminum Electrolytic Capacitors Radial, Can - SMD 1000 Hrs @ 105°C", Alternate Part Number-1=NA, Case/Package=Radial-SMD, Manufacturer=Nichicon, Manufacturer Part Number=UWT1E101MCL1GS, Supplier Part Number-1=UWT1E101MCL1GS, Supplier-1="SP ROAD"
C35 C39: library part CAP_22nF-50V-10%-0805, "0.022µF ±10% 50V Ceramic Capacitor X7R 0805 (2012 Metric)", Alternate Part Number-1=NA, Case/Package=0805, Manufacturer="Samsung Electro-Mechanics", Manufacturer Part Number=CL21B223KBANNNC, Supplier Part Number-1="1276-1081-1-ND - Cut Tape (CT)", Supplier-1=Digikey
C48 C49: library part CAP_150pF-50V-10%-0805, "150pF ±10% 50V Ceramic Capacitor C0G, NP0 0805 (2012 Metric)", Alternate Part Number-1=NA, Case/Package=0805, Manufacturer="AVX Corporation", Manufacturer Part Number=08055A151KAT2A, Supplier Part Number-1="478-10501-1-ND - Cut Tape (CT)", Supplier-1=Digikey
C65 C66: library part CAP_2.2uF-25V-10%-0805, "2.2µF ±10% 25V Ceramic Capacitor X7R 0805 (2012 Metric)", Alternate Part Number-1=NA, Case/Package=0805, Manufacturer=KEMET, Manufacturer Part Number=CL21B225KAFNFNE, Supplier Part Number-1=CL21A225KAFNNNE, Supplier-1=SIRICOM
C80 C81 C82: library part CAP-P_100uF-50V-20%-RAD, "100µF 50V Aluminum Polymer Capacitor Radial, Can - SMD 28mOhm 4000 Hrs @ 125°C", Alternate Part Number-1=VEU101M1HTR-1010, Case/Package=Radial-SMD, Manufacturer=Nichicon, Manufacturer Part Number=GYA1H101MCQ1GS, Supplier Part Number-1=GYA1H101MCQ1GS, Supplier-1="SP ROAD"
D1 D2 D3 D4: library part DIO-T_3.3V-8.8V-SOD923, "8.8V Clamp 5A (8/20µs) Ipp Tvs Diode Surface Mount SOD-923", Alternate Part Number-1=NA, Case/Package=SOD923, Manufacturer="Micro Commercial Co", Supplier Part Number-1="ESD3V3D9-TPMSCT-ND - Cut Tape (CT)", Manufacturer Part Number=ESD3V3D9-TP, Supplier-1=Digikey
D5 D7: library part DIO-S_445mV-30V-2A-SMB, "Diode Schottky 30V 2A Surface Mount SMB", Alternate Part Number-1=NA, Case/Package=SMB, Manufacturer="ON Semiconductor", Manufacturer Part Number=MBRS130LT3G, Supplier Part Number-1=MBRS130LT3G, Supplier-1=ARROW
D6: library part DIO-Z_3.3V-500mW-SOD123, "Zener Diode 3.3V 500mW ±6% Surface Mount SOD-123", Alternate Part Number-1=NA, Case/Package=SOD-123, Manufacturer="Diodes Incorporated", Supplier Part Number-1=BZT52C3V3-FDICT-ND, Manufacturer Part Number=BZT52C3V3-7-F, Supplier-1=Digikey
D8: library part DIO-Z_1.8V-500mW-DO213AA, "Zener Diode 1.8V 500mW ±5% Surface Mount DO-213AA"
DS1 DS2: library part LED_RED-2V-20mA-0805, "Red 631nm LED Indication - Discrete 2V 0805 (2012 Metric)", Alternate Part Number-1=NA, Case/Package=0805, Manufacturer="Vishay Lite-On", Manufacturer Part Number=LTST-C171KRKT, Supplier Part Number-1=LTST-C171KRKT, Supplier-1="SP ROAD"
FB1 FB2 FB3 FB4: library part FB_1K-100MHZ-1.6A-0805, "1 kOhms @ 100MHz 1 Power Line Ferrite Bead 0805 (2012 Metric) 1.6A", Alternate Part Number-1=NA, Case/Package=0805, Manufacturer=Laird, Manufacturer Part Number=BLM21SP102SH1D, Supplier Part Number-1=ACMS201209A102, Supplier-1=SIRICOM
J1 J5: library part CON_USB2.0-MINIB-SMD, "USB - mini B USB 2.0 Receptacle Connector 5 Position Surface Mount, Right Angle", Alternate Part Number-1=NA, Case/Package=USB-MINI-B, Manufacturer=EDAC, Manufacturer Part Number=690-005-299-043, Supplier Part Number-1=C105424, Supplier-1=LCSC
J2: library part CON-BS-SKT_6X1-100-ST-TH, "6 Pins, 1 Row 2.54mm Pitch, Straight bergstrip, Female", Alternate Part Number-1=NA, Case/Package=TH-CON, Manufacturer=Molex, Manufacturer Part Number=22-10-2061, Supplier Part Number-1=NA, Supplier-1="SP ROAD"
J3: library part CON-SKT-RJ_8C8P-RA-TH, "8 Pins, 2 Row 2.54mm Pitch, right angle Connector, male", Alternate Part Number-1=NA, Case/Package=TH-CON, Manufacturer=Assmann, Manufacturer Part Number=A-2004-2-4-LPS-N-R, Supplier Part Number-1=A-2004-2-4-LPS-N-R, Supplier-1="SP ROAD"
J4 J10: library part CON-PLG_2X1-100-ST-TH, "2 Pins, 1 Row 2.54mm Pitch, Straight Connector, male", Alternate Part Number-1=NA, Case/Package=TH-CON, Crimp Part Number=ASXHSXH22K51, Manufacturer=JST, Mating Part Number=XHP-2, Manufacturer Part Number=B2B-XH-A(LF)(SN), Supplier Part Number-1=B2B-XH-A(LF)(SN), Supplier-1="SP ROAD"
J6: library part CON-PLG_4X1-50-RA-TH, "4 Pins, 1 Row 1.25mm Pitch, right angle Connector, male", Alternate Part Number-1=NA, Case/Package=TH-CON, Crimp Part Number=653153128130, Manufacturer=JST, Manufacturer Part Number=653004117322, Mating Part Number=653004113322, Supplier Part Number-1=653004117322, Supplier-1=WURTH
J7: library part CON-PLG-STEREO_4X1-100-RA-SMD, "2.50mm (0.094\", 3/32\", Sub Mini, Miniature) - Headphone Phone Jack Stereo (4 Conductor, TRRS) Connector Solder", Alternate Part Number-1=NA, Case/Package=SMD, Manufacturer="CUI Devices", Manufacturer Part Number=SJ-2504A-SMT-TR, Supplier Part Number-1="CP-SJ-2504A-SMT-CT-ND - Cut Tape (CT)", Supplier-1=Digikey
J8 J9: library part CON-PLG_4X1-100-ST-TH, "4 Pins, 1 Row 2.54mm Pitch, straight Connector, male", Alternate Part Number-1=NA, Case/Package=TH-CON, Crimp Part Number=ASXHSXH22K51, Manufacturer="Wurth Electronics", Mating Part Number=XHP-4, Manufacturer Part Number=B4B-XH-A(LF)(SN), Supplier Part Number-1=B4B-XH-A(LF)(SN), Supplier-1=LCSC
J11: library part CON-TB_3X1-100-ST-TH, "3 Pins, 1 Row 2.54mm Pitch, straight Connector, male", Alternate Part Number-1=NA, Case/Package=TH-CON, Manufacturer="Phoenix Contact", Manufacturer Part Number=1725669, Supplier Part Number-1=1725669, Supplier-1="SP ROAD"
J12: library part CON-BS-PLG_4X1-100-ST-TH, "4 Pins, 1 Row 2.54mm Pitch, Straight bergstrip, Male", Alternate Part Number-1=NA, Case/Package=TH-CON, Manufacturer=NA, Manufacturer Part Number=NA, Supplier Part Number-1=NA, Supplier-1="SP ROAD"
MH1 MH2 MH3 MH4: library part MH_3.5H_6D, Alternate Part Number-1=NA, Case/Package=TH, Manufacturer=NA, Manufacturer Part Number=NA, Supplier Part Number-1=NA, Supplier-1=NA
Q1 Q2: library part MOSFET-N_60V-14.8A-V-DFN5045-12, "Mosfet Array 4 N-Channel 14.8A (Ta) Surface Mount V-DFN5045-12", Alternate Part Number-1=DMHT3006LFJ-13, Case/Package=DFN5045-12, Manufacturer="ON Semiconductor", Supplier Part Number-1=C460986, Manufacturer Part Number=DMHT6016LFJ-13, Supplier-1=LCSC
R1 R4 R27 R34 R36: library part RES_100K-0.1W-1%-0603, "100 kOhms ±1% 0.1W, 1/10W Chip Resistor 0603 (1608 Metric) Automotive AEC-Q200 Thick Film", Alternate Part Number-1=NA, Case/Package=0603, Manufacturer="Stackpole Electronics", Manufacturer Part Number=RMCF0603FT100K, Supplier Part Number-1=RMCF0603FT100K, Supplier-1=Arrow
R2 R5 R8 R9 R10 R15 R16 R17 R18 R21 R22 R23 R24 R25 R26 R32 R33 R35 R39 R40 R41 R42 R45 R46 R47 R48: library part RES_10K-0.1W-1%-0603, "10 kOhms ±1% 0.1W, 1/10W Chip Resistor 0603 (1608 Metric) Automotive AEC-Q200 Thick Film", Alternate Part Number-1=0603WAJ0103T5E, Case/Package=0603, Manufacturer=Walsin, Manufacturer Part Number=WR06X1002FTL, Supplier Part Number-1=WR06X1002FTL, Supplier-1=SIRICOM
R3: library part RES_1.5K-0.125W-1%-0805, "1.5 kOhms ±1% 0.125W, 1/8W Chip Resistor 0805 (2012 Metric) Thick Film", Alternate Part Number-1=NA, Case/Package=0805, Manufacturer="TE Connectivity Passive Product", Manufacturer Part Number=CRG0805F1K5, Supplier Part Number-1=NA, Supplier-1=SIRICOM
R6 R7 R14 R38: library part RES_3.3K-0.1W-1%-0603, "3.3 kOhms ±1% 0.1W, 1/10W Chip Resistor 0603 (1608 Metric) Automotive AEC-Q200 Thick Film", Alternate Part Number-1=0603WAF3301T5E, Case/Package=0603, Manufacturer=Wilson, Manufacturer Part Number=WR06X3301FTL, Supplier Part Number-1=WR06X3301FTL, Supplier-1=SIRICOM
R11: library part RES_6.49K-0.125W-1%-0805, "6.49 kOhms ±1% 0.125W, 1/8W Chip Resistor 0805 (2012 Metric) Moisture Resistant Thick Film", Alternate Part Number-1=NA, Case/Package=0805, Manufacturer="Stackpole Electronics", Manufacturer Part Number=RC0805FR-076K49L, Supplier Part Number-1=WRO8X6491FTL, Supplier-1=SIRICOM
R12: library part RES_1M-0.25W-1%-1206, "1 MOhms ±1% 0.25W, 1/4W Chip Resistor 1206 (3216 Metric) Automotive AEC-Q200, High Voltage Thick Film", Alternate Part Number-1=NA, Case/Package=1206, Manufacturer=Walsin, Manufacturer Part Number=WR12X1004FTL, Supplier Part Number-1=WR12X1004FTL, Supplier-1=SIRICOM
R13 R37: library part RES_2K-0.125W-1%-0603, "2 kOhms ±1% 0.125W, 1/8W Chip Resistor 0603 (1608 Metric) Anti-Sulfur, Moisture Resistant Thin Film", Alternate Part Number-1=NA, Case/Package=0603, Manufacturer="Stackpole Electronics", Manufacturer Part Number=RNCP0603FTD2K00, Supplier Part Number-1=WR06X2001FTL, Supplier-1=SIRICOM
R19 R43: library part RES_50mOhm-2W-1%-2512, "50 mOhms ±1% 2W Chip Resistor 2512 (6432 Metric) Automotive AEC-Q200, Current Sense, Moisture Resistant Metal Element", Alternate Part Number-1=PMR100HZPFU5L00, Case/Package=2512, Manufacturer=Yageo, Manufacturer Part Number=PA2512FKF7W0R05E, Supplier Part Number-1=LR2512-22R060F1, Supplier-1=SIRICOM
R20 R44: library part RES_33K-0.125W-1%-0805, "Thick Film Resistors - SMD 33KOhms 1/8W 150V33 kOhms ±1% 0.125W, 1/8W Chip Resistor 0805 (2012 Metric) Thick Film", Alternate Part Number-1=NA, Case/Package=0805, Manufacturer="Vishay BCcomponents", Manufacturer Part Number=CRG0805F33K, Supplier Part Number-1=WR08X3302FTL, Supplier-1=SIRICOM
R28 R29: library part RES_1K-0.1W-1%-0603, "1 kOhms ±1% 0.1W, 1/10W Chip Resistor 0603 (1608 Metric) Automotive AEC-Q200 Thick Film", Alternate Part Number-1=0603WAF1001T5E, Case/Package=0603, Manufacturer=Walsin, Manufacturer Part Number=WR06X1001FTL, Supplier Part Number-1=WR06X1001FTL, Supplier-1=SIRICOM
R30 R31: library part RES_51.1R-0.1W-1%-0603, "51.1 Ohms ±1% 0.1W, 1/10W Chip Resistor 0603 (1608 Metric) Thick Film", Alternate Part Number-1=NA, Case/Package=0603, Manufacturer="Vishay Dale", Manufacturer Part Number=CRCW060351R1FKEAC, Supplier Part Number-1="541-5468-1-ND - Cut Tape (CT)", Supplier-1=Digikey
SW1 SW2 SW3: library part SW1_RS-282G05A3-SMRT-SMD, "Tactile Switch SPST-NO Top Actuated Surface Mount", Alternate Part Number-1=NA, Case/Package=SMD, Manufacturer="ITT C&K", Manufacturer Part Number=RS-282G05A3-SMRT, Supplier Part Number-1=RS-282G05A3-SMRT, Supplier-1="SP ROAD"
U1: library part IC_STM32F103C8T6, "ARM® Cortex®-M3 STM32F1 Microcontroller IC 32-Bit 72MHz 64KB (64K x 8) FLASH 48-LQFP (7x7)", Alternate Part Number-1=NA, Case/Package=LQFP48, Manufacturer=STMicroelectronics, Manufacturer Part Number=STM32F103C8T6, Supplier Part Number-1=STM32F103C8T6, Supplier-1=LCSC
U2: library part IC_DP83826IRHBR, "Ethernet ICs Low latency 10/100-Mbps PHY, MII interface and enhanced mode with an industrial temperature range 32-VQFN -40 to 85", Alternate Part Number-1=NA, Case/Package=32-VQFN, Manufacturer="Texas Instruments", Supplier Part Number-1=595-DP83826IRHBR, Manufacturer Part Number=DP83826IRHBR, Supplier-1=Mouser
U3 U9: library part IC_DRV8701ERGET, "Motor Driver Power MOSFET Parallel 24-VQFN (4x4)", Alternate Part Number-1=NA, Case/Package=VFQFN24, Manufacturer="Texas Instruments", Manufacturer Part Number=DRV8701ERGET, Supplier Part Number-1=DRV8701ERGET, Supplier-1=ARROW
U4: library part IC_CH340C, "USB Bridge, USB to UART USB 2.0 UART Interface", Alternate Part Number-1=NA, Case/Package=SOIC16, Manufacturer=Olimex, Supplier Part Number-1=C84681, Manufacturer Part Number=CH340C, Supplier-1=LCSC
U5: library part IC_ADS122C04IPW, "24 Bit Analog to Digital Converter 4 Input 1 Sigma-Delta 16-TSSOP", Alternate Part Number-1=NA, Case/Package=TSSOP16, Manufacturer="Texas Instruments", Manufacturer Part Number=ADS122C04IPW, Supplier Part Number-1=ADS122C04IPW, Supplier-1=MOUSER
U6: library part IC_CS43L22, "Audio D/A Converter ICs Low Power Stereo DAC w/ClassD Spkr Driver", Alternate Part Number-1=NA, Case/Package=QFN-40, Manufacturer="Cirrus Logic", Supplier Part Number-1=777-CS43L22-CNZ, Manufacturer Part Number=CS43L22-CNZ, Supplier-1=Mouser
U7: library part IC_IMP34DT05TR, "MEMS Microphones AUTO & INDUSTRIAL SENSORS", Alternate Part Number-1=NA, Case/Package=HCLGA-4, Manufacturer=STMicroelectronics, Supplier Part Number-1=511-IMP34DT05TR, Manufacturer Part Number=IMP34DT05TR, Supplier-1=Mouser
U8: library part IC_STM32F407VGT6, "ARM® Cortex®-M4 STM32F4 Microcontroller IC 32-Bit 168MHz 1MB (1M x 8) FLASH 100-LQFP (14x14)", Alternate Part Number-1=STM32F407VET6, Case/Package=LQFP100, Manufacturer=STMicroelectronics, Manufacturer Part Number=STM32F407VGT6, Supplier Part Number-1=STM32F407VGT6, Supplier-1=ARROW
U10: library part REG_15V-3.3V-0.9A-12W-SOT223, "Linear Voltage Regulator IC 1 Output 800mA SOT-223", Alternate Part Number-1=NA, Case/Package=SOT223, Manufacturer=STMicroelectronics, Manufacturer Part Number=LD1117S33CTR, Supplier Part Number-1=LD1117S33CTR, Supplier-1="SP ROAD"
U11: library part REG_15V-1.8V-0.8A-1.4W-SOT223, "LDO Voltage Regulators 1.8V 0.8A Positive", Alternate Part Number-1=NA, Case/Package=SOT-223-3, Manufacturer=STMicroelectronics, Supplier Part Number-1=511-LD1117S18-TR, Manufacturer Part Number=LD1117S18TR, Supplier-1=Mouser
X1 X2: library part XTAL_8MHZ-ECS-80-32-5PX-SMD, "8MHz ±30ppm Crystal 32pF 60 Ohms HC-49/US", Alternate Part Number-1=NA, Case/Package=SMD/SMT, Manufacturer="Fox Electronics", Manufacturer Part Number=ECS-80-32-5PX-TR, Supplier Part Number-1=ECS-80-32-5PX-TR, Supplier-1="SP ROAD"
Y1: library part XTAL_25Mhz-FOXSDLF/250F-20, "25MHz ±30ppm Crystal 20pF 30 Ohms HC-49/US", Alternate Part Number-1=NA, Case/Package=SMD, Manufacturer=Abracon, Manufacturer Part Number=FOXSDLF/250F-20, Supplier Part Number-1=FOXSDLF/250F-20, Supplier-1=MOUSER

## Via types
v1: diameter 0.8, hole 0.4, Top Layer to Bottom Layer, 10 vias

## Nets (pads, with @x,y where several pads share a name; then routed paths per layer and width w, separated by ;. In a path a pad name is that pad's centre, name@x,y a point inside that pad or via, vN(x,y) a via of type N, cw(c..) or ccw(c..) an arc to the next point about the centre after c; other vN are vias at no path point)
+1V8: C37.2 C38.2 C87.2 C88.2 C89.2 D8.K FB3.1 U6.34 U11.2 U11.4
+3V3: C1.2 C2.2 C3.2 C4.2 C7.2 C8.2 C9.2 C16.2 C17.2 C18.2 C19.2 C28.2 C29.2 C31.2 C44.2 C45.2 C46.2 C47.2 C52.2 C53.2 C54.2 C55.2 C59.2 C60.2 C61.2 C62.2 C63.2 C64.2 C71.2 C78.2 C79.2 C83.2 D6.K FB1.1 FB2.1 FB4.1 J6.3 J8.3 J9.3 R2.2 R3.2 R5.2 R8.2 R9.2 R10.1 R21.1 R25.2 R26.2 R27.2 R32.2 R33.2 R35.2 R45.1 U1.1 U1.9 U1.24 U1.36 U1.48 U2.17 U4.4 U4.16 U5.13 U6.5 U6.8 U6.33 U7.1 U8.6 U8.11 U8.19 U8.28 U8.50 U8.75 U8.100 U10.2 U10.4
+12V: C23.2 C24.1 C25.2 C73.2 C75.2 C80.1 C81.1 C82.1 D5.A D7.A J11.1 Q1.2 Q1.11 Q1.15 Q2.2 Q2.11 Q2.15 U3.1 U9.1
AIN0: J6.1 R28.2
AIN1: J6.2 R29.2
CAN_RX: J9.1 U8.70
CAN_TX: J9.2 U8.71
CH340_RST: U4.14 U8.57
CH340_RXD: U4.3 U8.79
CH340_TXDPort: U4.2 U8.78
CH340USB_D_N: J5.2 U4.6
CH340USB_D_P: J5.3 U4.5
CLK_MIC: U7.3 U8.65
COL: DS1.A U2.28 U8.26
CRS: DS2.A U2.29 U8.23
DOUT_MIC: U7.4 U8.53
DRDY: U5.14 U8.56
DVDD: C27.2 R23.2 R24.2 R46.2 R47.2 U3.8
DVDD_2: C77.2 U9.8
EARTH: C21.1 J11.2 R12.1
EN: R22.2 U3.14 U8.45
EN_2: R48.2 U8.66 U9.14
EXT_UART_RX: J8.1 U8.69
EXT_UART_TX: J8.2 U8.68
GH1: Q1.1 R15.1 U3.17
GH1_2: Q2.1 R39.1 U9.17
GH2: Q1.12 R16.2 U3.24
GH2_2: Q2.12 R40.2 U9.24
GL1: Q1.4 R17.1 U3.19
GL1_2: Q2.4 R41.1 U9.19
GL2: Q1.9 R18.1 U3.22
GL2_2: Q2.9 R42.1 U9.22
GND: C1.1 C2.1 C3.1 C4.1 C5.1 C6.1 C7.1 C8.1 C9.1 C10.1 C11.1 C12.1 C13.1 C14.1 C15.1 C16.1 C17.1 C18.1 C19.1 C20.1 C24.2 C25.1 C26.1 C27.1 C28.1 C29.1 C30.1 C31.1 C33.1 C34.1 C35.2 C36.1 C37.1 C38.1 C39.2 C40.1 C41.1 C43.1 C44.1 C45.1 C46.1 C47.1 C48.2 C49.2 C50.2 C51.2 C52.1 C53.1 C54.1 C55.1 C56.2 C57.1 C58.2 C59.1 C60.1 C61.1 C62.1 C63.1 C64.1 C65.1 C66.1 C67.1 C68.1 C69.1 C70.1 C71.1 C75.1 C76.1 C77.1 C78.1 C79.1 C80.2 C81.2 C82.2 C83.1 C84.1 C85.1 C86.1 C87.1 C88.1 C89.1 C90.1 C91.1 C92.1 D1.A D2.A D3.A D4.A D6.A D8.A J1.5 J1.6 J2.6 J5.5 J5.6 J6.4 J7.1 J8.4 J9.4 J11.3 R1.1 R4.1 R6.1 R7.1 R11.1 R14.1 R19.1 R20.1 R22.1 R34.1 R36.2 R38.1 R43.1 R44.1 R48.1 SW1.1 SW2.1 SW3.1 U1.8 U1.23 U1.35 U1.47 U2.33 U3.5 U3.16 U3.20 U3.25 U4.1 U5.1 U5.2 U5.4 U5.5 U6.3 U6.17 U6.22 U6.31 U6.35 U6.41 U7.5 U8.10 U8.20 U8.27 U8.74 U8.99 U9.5 U9.16 U9.20 U9.25 U10.1 U11.1
  other v1: 48.424,9.562 49.874,9.562 49.149,10.287 48.424,11.012 49.874,11.012 48.297,22.516 49.747,22.516 49.022,23.241 48.297,23.966 49.747,23.966
INT: R8.1 U2.21
JTCK/SWCLK_F103: J2.3 U1.37
JTCLK_F407: U1.18 U8.76
JTDI_F103: J2.2 U1.38
JTDO_F103: J2.5 U1.39
JTMS/SWDIO_F103: J2.4 U1.34
JTMS_F407: U1.25 U1.27 U8.72
LRCK: U6.40 U8.90
MCLK: U6.37 U8.29
MDC: U2.12 U8.16
MDIO: R10.2 U2.11 U8.25
NetC5_2: C5.2 U1.5 X1.2
NetC6_2: C6.2 U1.6 X1.1
NetC10_2: C10.2 U2.2
NetC11_2: C11.2 C12.2 C13.2 C14.2 FB1.2 U2.3
NetC15_2: C15.2 U2.8 Y1.2
NetC20_2: C20.2 U2.9 Y1.1
NetC21_2: C21.2 J3.9 J3.10 R12.2
NetC22_1: C22.1 U3.3
NetC22_2: C22.2 U3.4
NetC23_1: C23.1 U3.2
NetC26_2: C26.2 R13.2 U3.7
NetC30_2: C30.2 FB2.2 U5.12
NetC32_1: C32.1 C33.2 R29.1 U5.10
NetC32_2: C32.2 C34.2 R28.1 U5.11
NetC35_1: C35.1 R31.2
NetC36_2: C36.2 C40.2 C41.2 FB3.2 U6.13 U6.16
NetC39_1: C39.1 R30.2
NetC42_1: C42.1 U6.11
NetC42_2: C42.2 U6.12
NetC43_2: C43.2 U6.10
NetC48_1: C48.1 U6.27
NetC49_1: C49.1 U6.28
NetC50_1: C50.1 U6.18
NetC51_1: C51.1 U6.19
NetC56_1: C56.1 U8.12 X2.2
NetC58_1: C58.1 U8.13 X2.1
NetC65_2: C65.2 U8.73
NetC66_2: C66.2 U8.49
NetC67_2: C67.2 C68.2 C69.2 C70.2 FB4.2 U8.21 U8.22
NetC72_1: C72.1 U9.3
NetC72_2: C72.2 U9.4
NetC73_1: C73.1 U9.2
NetC76_2: C76.2 R37.2 U9.7
NetC84_2: C84.2 C85.2 C86.2 D5.K U10.3
NetC90_2: C90.2 C91.2 C92.2 D7.K U11.3
NetDS1_K: DS1.K R6.2
NetDS2_K: DS2.K R7.2
NetJ7_2: J7.2 R30.1 U6.14
NetJ7_3: J7.3 R31.1 U6.15
NetQ1_7: Q1.7 R19.2
NetQ2_7: Q2.7 R43.2
NetR1_2: R1.2 U1.44
NetR4_2: R4.2 U1.20
NetR9_1: R9.1 U2.1
NetR11_2: R11.2 U2.10
NetR13_1: R13.1 R14.2 U3.6
NetR20_2: R20.2 U3.12
NetR21_2: R21.2 U3.13
NetR33_1: R33.1 U7.2
NetR34_2: R34.2 U8.37
NetR36_1: R36.1 U8.94
NetR37_1: R37.1 R38.2 U9.6
NetR44_2: R44.2 U9.12
NetR45_2: R45.2 U9.13
nFAULT: R24.1 U3.9 U8.62
nFAULT_2: R47.1 U8.59 U9.9
NRST: R2.1 SW1.2 U1.7
NTJRST_F103: J2.1 U1.40
NTRST_F407: C57.2 R35.1 SW3.2 U1.26 U8.14
OUTA+: J12.1 U6.4
OUTA-: J12.2 U6.6
OUTB+: J12.3 U6.7
OUTB-: J12.4 U6.9
PH: U3.15 U8.63
PH_2: U8.60 U9.15
PHY_RESET: R5.1 SW2.2 U2.32 U8.64
RD_N: D4.K J3.6 U2.4
RD_P: D3.K J3.5 U2.5
RESET: R27.1 U5.3 U8.55
RESET_DAC: R32.1 U6.32 U8.54
RX_CLK: U2.19 U8.24
RX_D0: U2.16 U8.33
RX_D1: U2.15 U8.34
RX_D2: U2.14 U8.35
RX_D3: U2.13 U8.36
RX_DV: U2.18 U8.32
RX_ER: U2.20 U8.47
SCL: R25.1 U5.16 U6.2 U8.92
SCLK: U6.38 U8.89
SDA: R26.1 U5.15 U6.1 U8.93
SDIN: U6.39 U8.80
SH1: J4.1 Q1.3 Q1.13 R15.2 U3.18
SH1_2: J10.1 Q2.3 Q2.13 R39.2 U9.18
SH2: J4.2 Q1.10 Q1.14 R16.1 U3.23
SH2_2: J10.2 Q2.10 Q2.14 R40.1 U9.23
SNSOUT: R23.1 U3.10 U8.61
SNSOUT_2: R46.1 U8.58 U9.10
SO: U3.11 U8.30
SO_2: U8.31 U9.11
SP: Q1.5 Q1.6 Q1.8 R17.2 R18.2 U3.21
SP_2: Q2.5 Q2.6 Q2.8 R41.2 R42.2 U9.21
TD_N: D2.K J3.2 U2.6
TD_P: D1.K J3.1 U2.7
TX_CLK: U2.22 U8.18
TX_D0: U2.24 U8.51
TX_D1: U2.25 U8.52
TX_D2: U2.26 U8.17
TX_D3: U2.27 U8.1
TX_EN: U2.23 U8.48
USBD_N: J1.2 U1.32
USBD_P: J1.3 R3.1 U1.33
pads on no net: J1.1 J1.4 J3. J3.3 J3.4 J3.7 J3.8 J5.1 J5.4 J7. J7.4 J12. MH1.1 MH2.1 MH3.1 MH4.1 U1.2 U1.3 U1.4 U1.10 U1.11 U1.12 U1.13 U1.14 U1.15 U1.16 U1.17 U1.19 U1.21 U1.22 U1.28 U1.29 U1.30 U1.31 U1.41 U1.42 U1.43 U1.45 U1.46 U2.30 U2.31 U4.7 U4.8 U4.9 U4.10 U4.11 U4.12 U4.13 U4.15 U5.6 U5.7 U5.8 U5.9 U6.20 U6.21 U6.23 U6.24 U6.25 U6.26 U6.29 U6.30 U6.36 U8.2 U8.3 U8.4 U8.5 U8.7 U8.8 U8.9 U8.15 U8.38 U8.39 U8.40 U8.41 U8.42 U8.43 U8.44 U8.46 U8.67 U8.77 U8.81 U8.82 U8.83 U8.84 U8.85 U8.86 U8.87 U8.88 U8.91 U8.95 U8.96 U8.97 U8.98

## Keep-outs
Keep-Out Layer:
  the board outline again, w0.127

## Silkscreen, mask and mechanical layers (free items; w line width, h text height)
Top Overlay:
  lines w0.254: 0,38 14,38 18,38 18,24 18,13 13.614,13 13.614,0

## Text inside footprints (layer, text, board x,y; h text height)
D5: Top Overlay "A" at 60.867,42.224 h0.89 r90; Top Overlay "K" at 60.992,49.349 h0.89 r90
D6: Top Overlay "K" at 61.107,36.924 h0.89; Top Overlay "A" at 56.794,36.991 h0.89
D7: Top Overlay "A" at 62.069,9.846 h0.89 r270; Top Overlay "K" at 61.944,2.721 h0.89 r270
DS1: Top Overlay "K" at 19.616,46.859 h0.56 r180; Top Overlay "A" at 14.903,46.784 h0.51 r180
DS2: Top Overlay "K" at 19.616,44.7 h0.56 r180; Top Overlay "A" at 14.903,44.625 h0.51 r180
U4: Bottom Overlay "16" at 35.331,54.966 h0.89; Bottom Overlay "9" at 34.603,44.002 h0.89; Bottom Overlay "8" at 42.497,43.879 h0.89; Bottom Overlay "1" at 42.57,54.839 h0.89
U5: Top Overlay "1" at 12.806,37.68 h0.64 r270; Top Overlay "16" at 12.827,29.591 h0.64 r270; Top Overlay "9" at 8.234,29.425 h0.64 r270; Top Overlay "8" at 8.23,37.897 h0.64 r270